# Altium PCB LED and Relay.PcbDoc
Units mm, origin at the board's own origin, x right, y up, seen from the top; angles counter-clockwise.
Board outline 56.13 x 53.21 mm, 2 copper layers (Top Layer, Bottom Layer); 37 components, 34 nets, 153 pads, 7 vias.
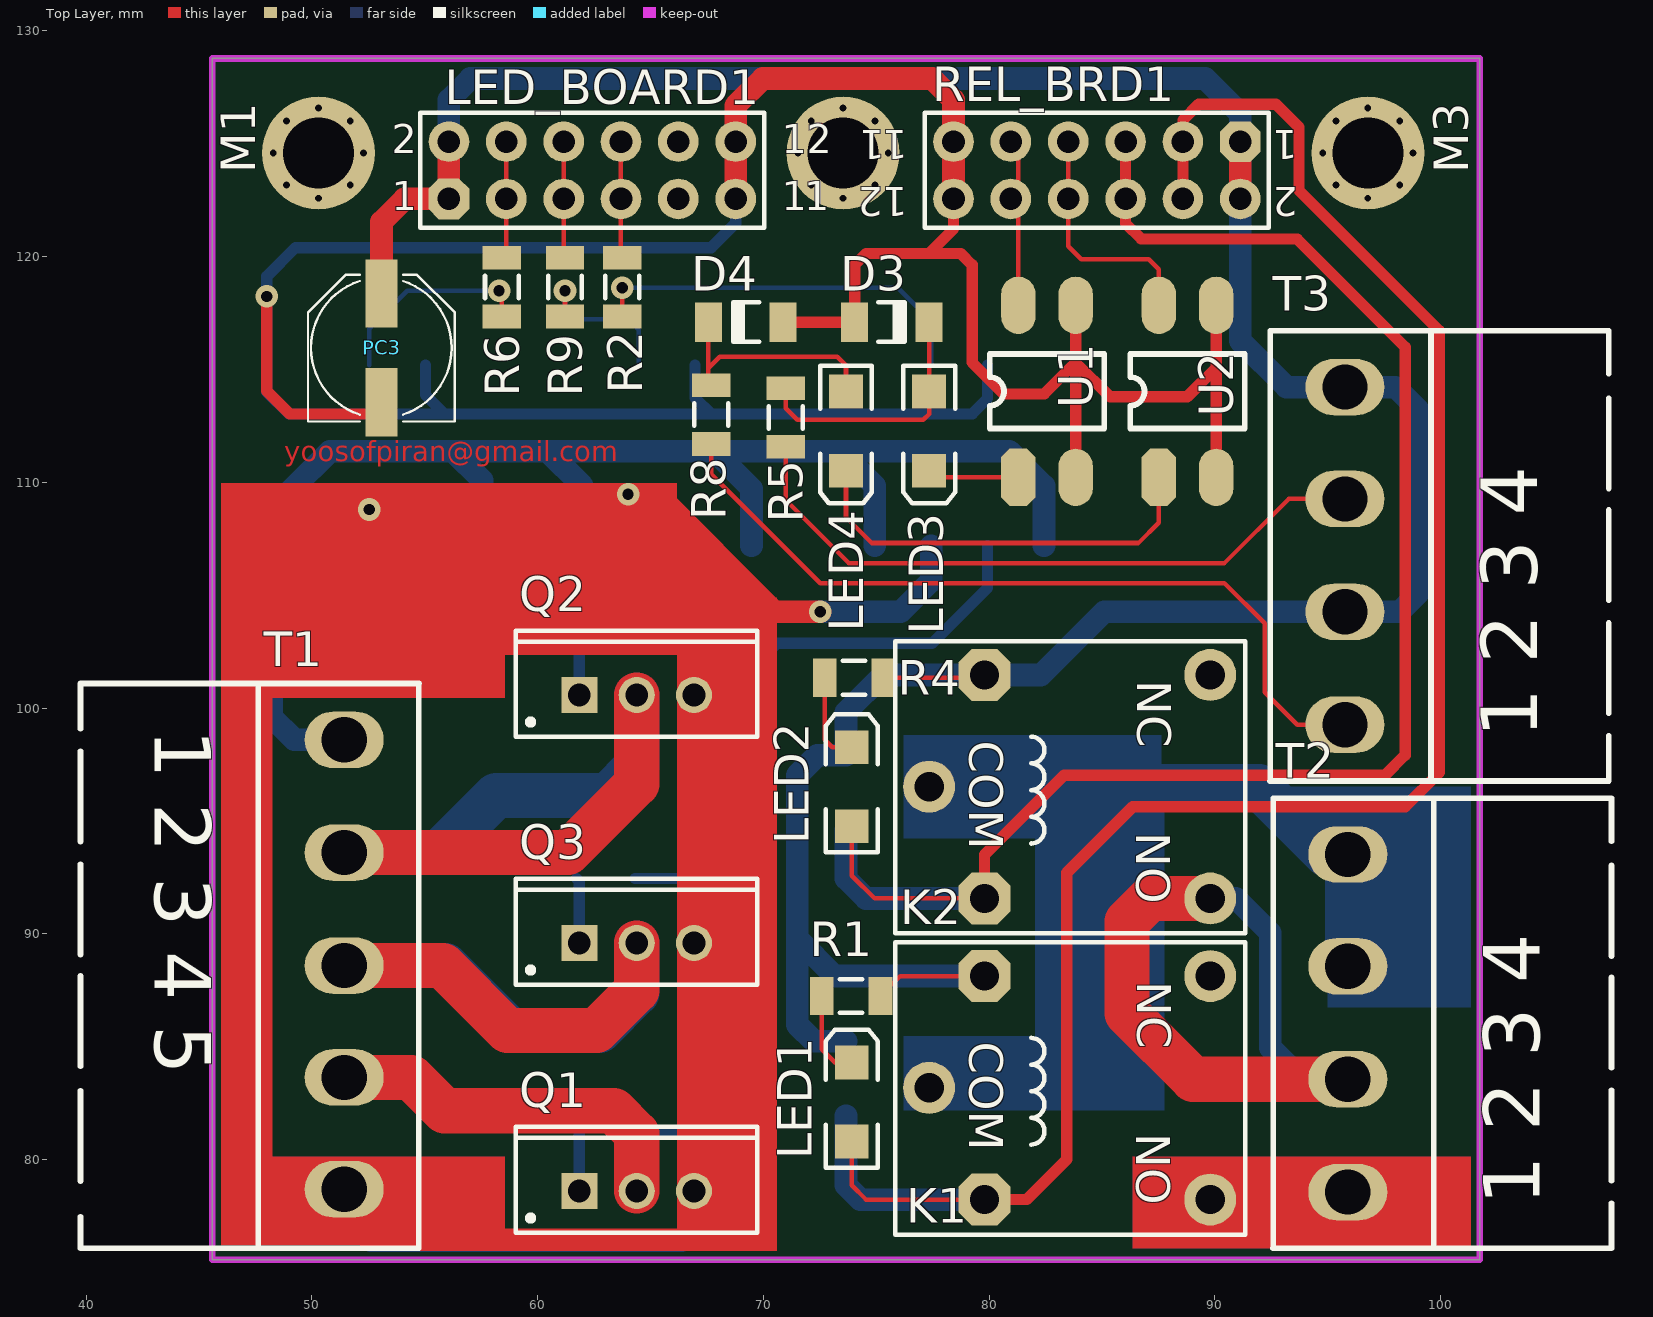
[diagram p0: Top Layer view]
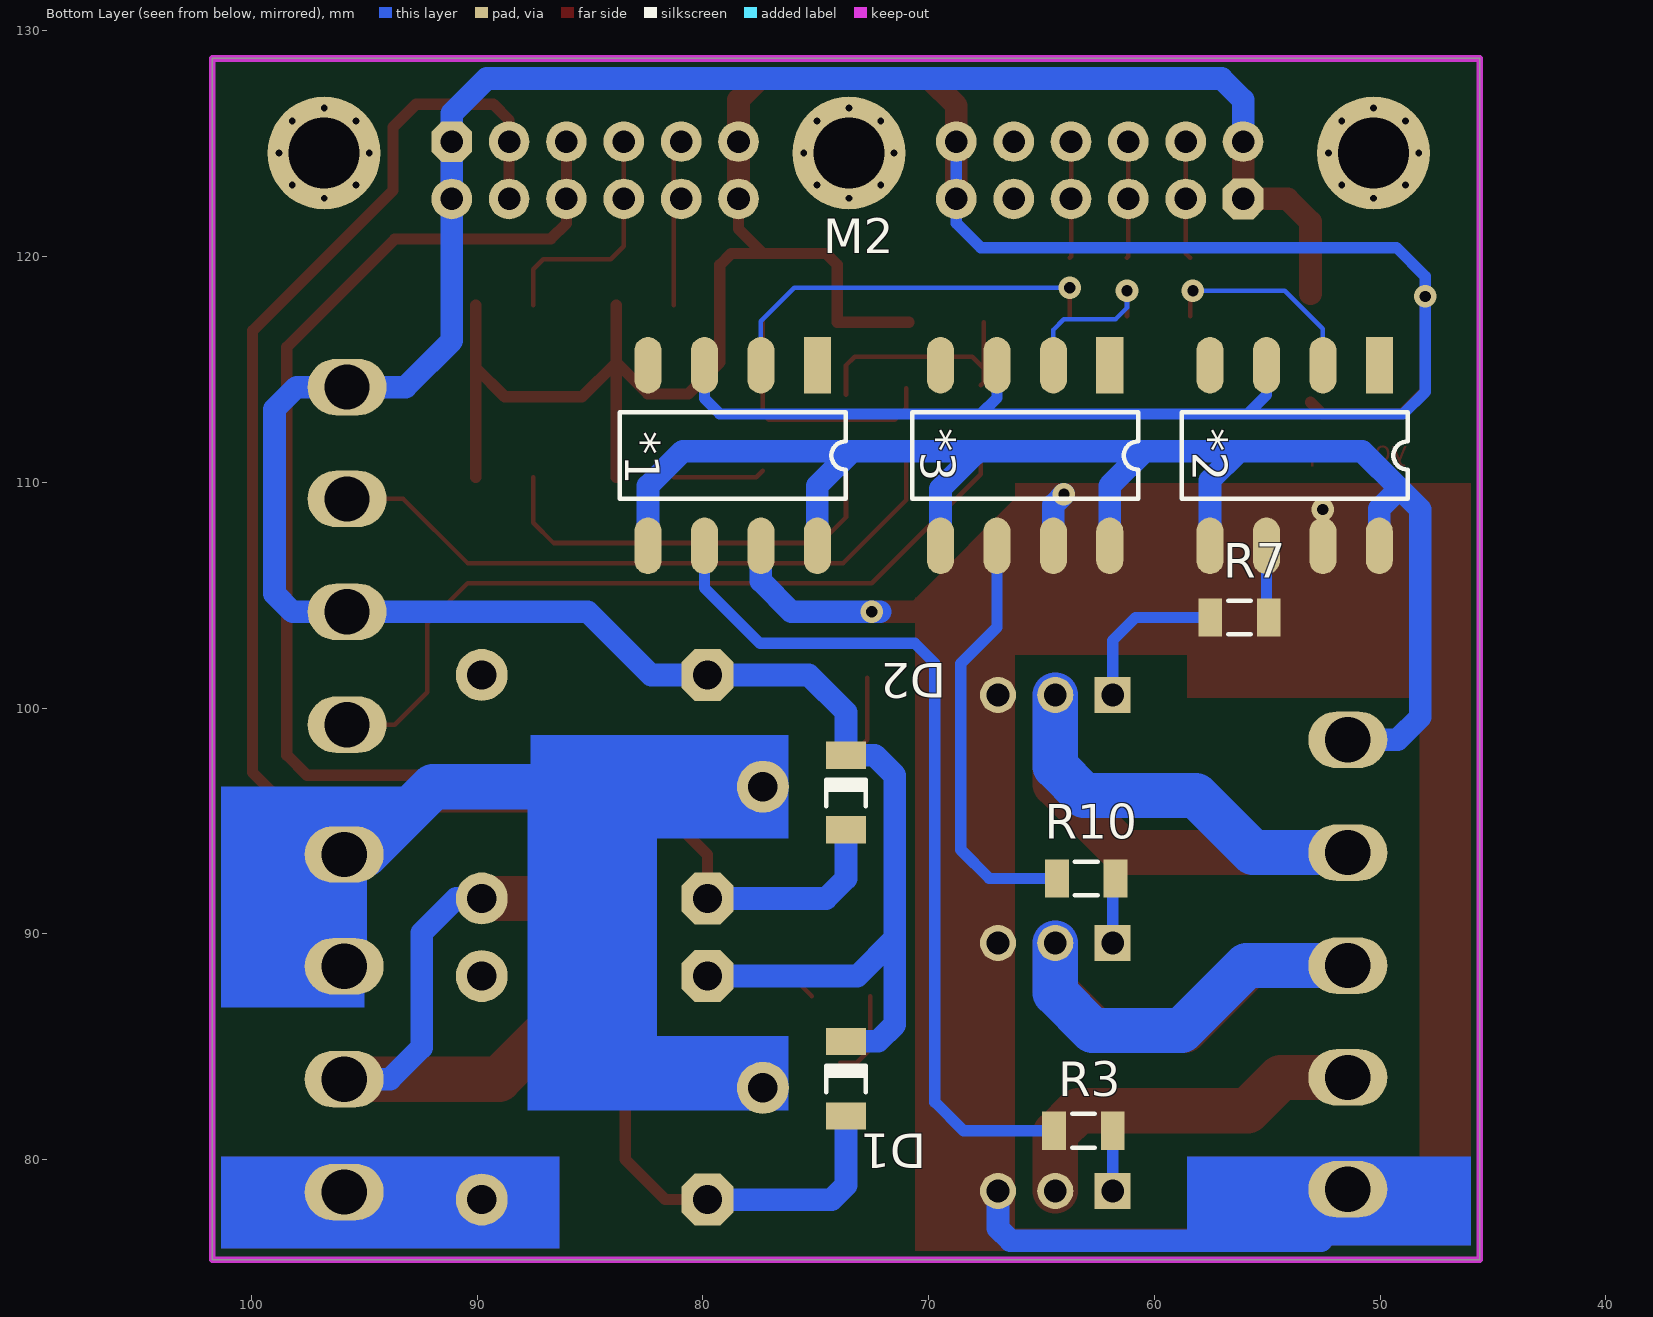
[diagram p1: Bottom Layer view, seen from below]
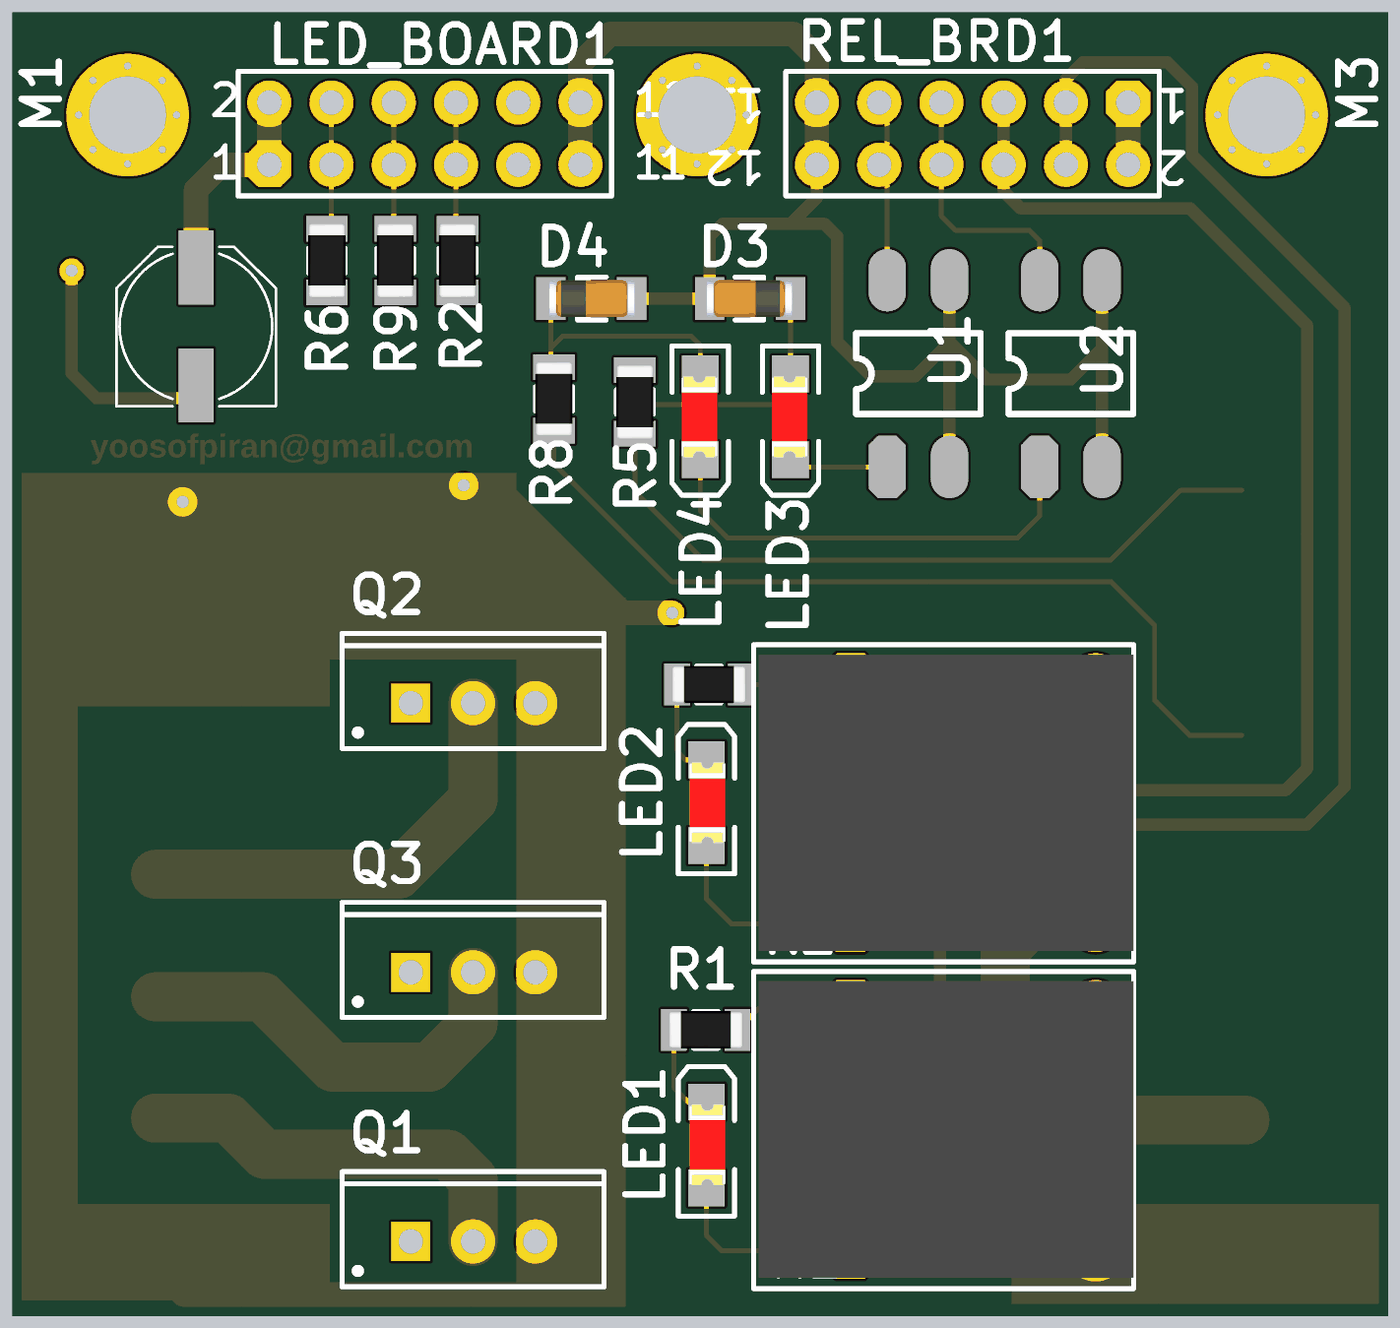
[diagram p2: 3D render of the assembled board from above, using the file's embedded part models]
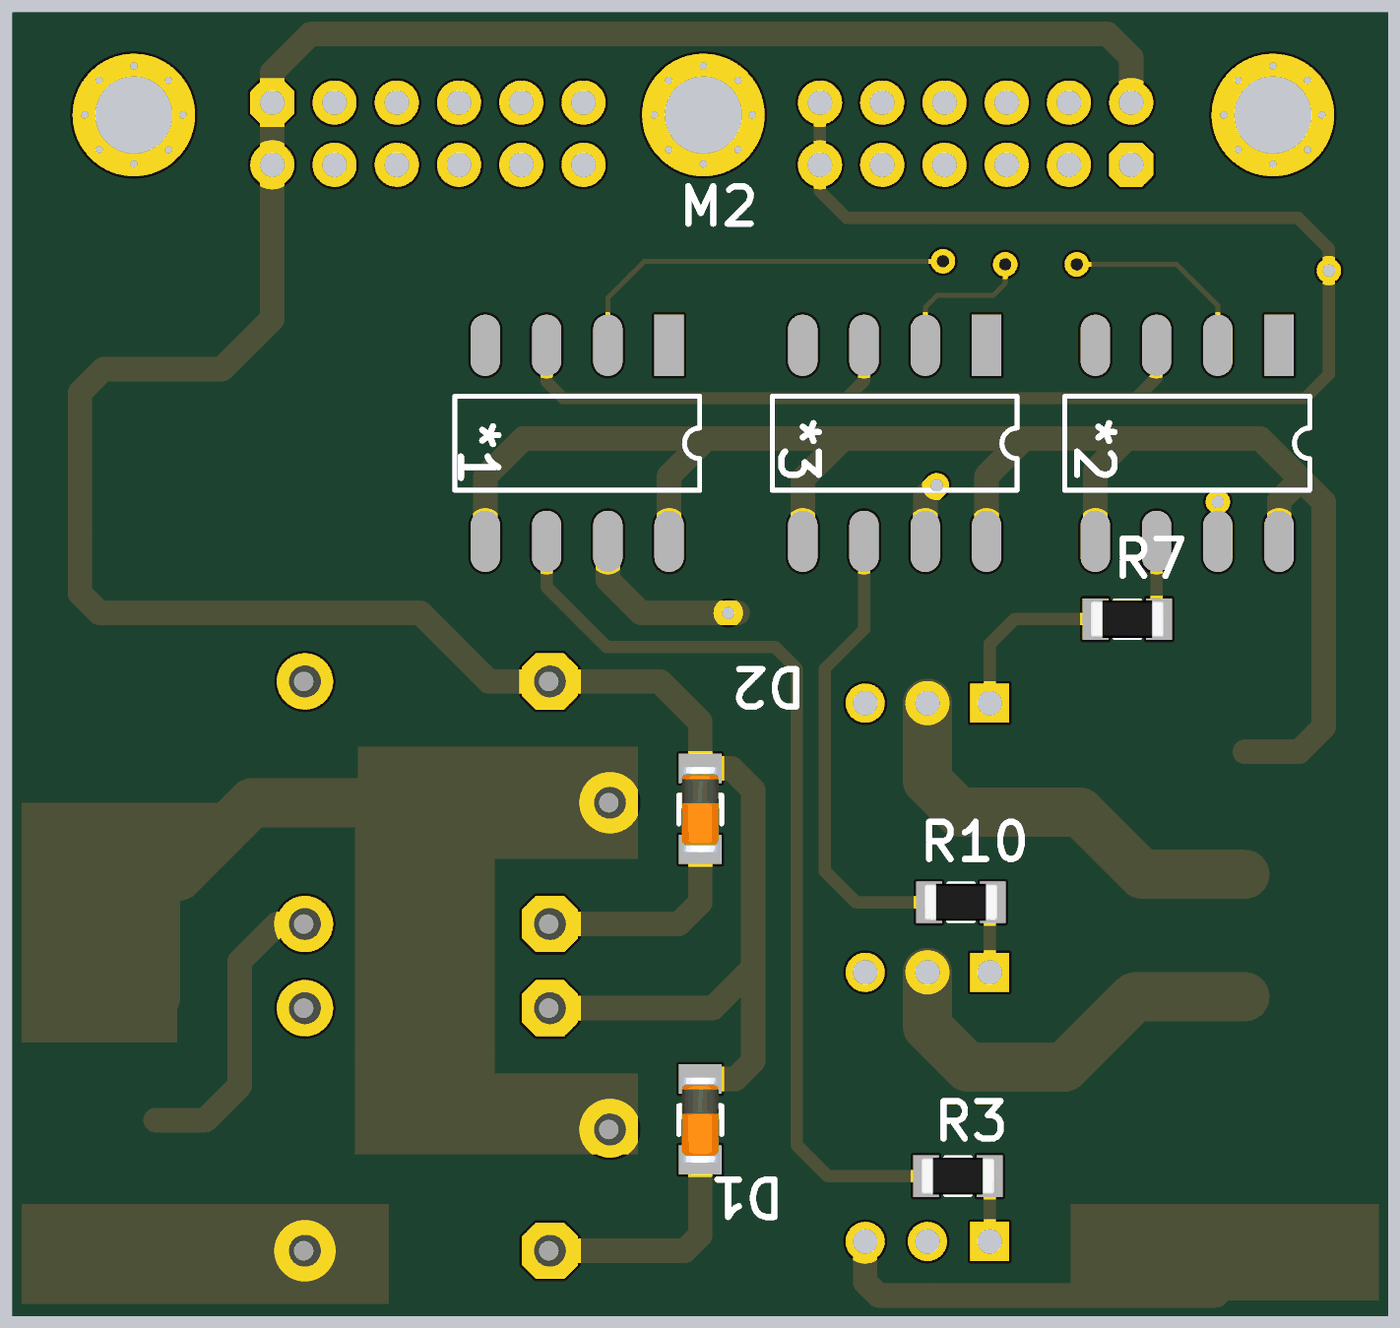
[diagram p3: 3D render of the assembled board from below, using the file's embedded part models]

## Layer stack, top to bottom
Top Solder: solder mask 0.0102, Solder Resist, Dk 3.5
Top Layer: signal copper 0.0356
Dielectric 1: dielectric 0.32, FR-4, Dk 4.8
Bottom Layer: signal copper 0.0356
Bottom Solder: solder mask 0.0102, Solder Resist, Dk 3.5

## Board outline
45.593,75.565 101.727,75.565 101.727,128.778 45.593,128.778

## Design rules (kind name [scope] priority, off if disabled: settings)
Clearance [All] p1: gap=0.2
PolygonConnect [All] p1: connectstyle=Relief reliefconductorwidth=0.254 reliefentries=4 polygonreliefangle="90 Angle" airgapwidth=0.254
RoutingVias [All] p1: holewidth=0.5 width=1 viastyle="Through Hole" minholewidth=0.5 minwidth=1 maxholewidth=4 maxwidth=5
SolderMaskExpansion [All] p1: expansion=0.102
Width [All] p1: maxlimit=5 minlimit=0.2 preferedwidth=0.2
29 further rules are at their usual default settings.

## Classes and differential pairs
component class Sheet1: *1 *2 *3 D1 D2 D3 D4 K1 K2 LED1 LED2 LED3 LED4 LED_BOARD1 M1 M2 M3 Q1 Q2 Q3 R1 R2 R3 R6 R7 R8 R9 R10 REL_BRD1 T1 T3 U1 U2

## Components (designator, comment, footprint, x,y, rotation, side; value= is the part's Value field where it differs from the comment)
*1 "PC923" PC923 82.423,107.188 r180 bottom
*2 "PC923" PC923 57.531,107.188 r180 bottom
*3 "PC923" PC923 69.469,107.188 r180 bottom
D1 "1N4148" LL4148 73.66,83.594 r90 bottom
D2 "1N4148" LL4148 73.66,96.266 r90 bottom
D3 "1N4148" LL4148 75.692,117.094 r0 top
D4 "1N4148" LL4148 69.215,117.094 r180 top
K1 "Relay" "Relay 15.40x12.10x13.10" 77.343,83.185 r270 top
K2 "Relay" "Relay 15.40x12.10x13.10" 77.343,96.52 r270 top
LED1 "Red" "LED SMD 1206" 73.914,82.55 r90 top
LED2 "Red" "LED SMD 1206" 73.914,96.52 r90 top
LED3 "Red" "LED SMD 1206" 77.343,112.268 r270 top
LED4 "Red" "LED SMD 1206" 73.66,112.268 r270 top
LED_BOARD1 "Header 6X2" HDR2X6 56.073,122.555 r0 top
M1 "Screw" "Board Screw_No Silk" 50.292,124.587 r0 top
M2 "Screw" "Board Screw_No Silk" 73.533,124.587 r180 bottom (schematic designator M1)
M3 "Screw" "Board Screw_No Silk" 96.774,124.587 r0 top (schematic designator M2)
PC3 "47u" PANASONIC_D 53.086,115.951 r90 top (schematic designator PC1)
Q1 "IRF3205" TO-220AB 64.389,78.613 r0 top
Q2 "IRF3205" TO-220AB 64.389,100.584 r0 top
Q3 "IRF3205" TO-220AB 64.389,89.599 r0 top
R1 "1K" "RES 1206 (3216X08L)" 75.184,87.249 r180 top
R2 "220" "RES 1206 (3216X08L)" 63.754,117.348 r90 top
R3 "20" "RES 1206 (3216X08L)" 61.849,81.28 r0 bottom
R4 "1K" "RES 1206 (3216X08L)" 75.311,101.346 r180 top
R5 "1K" "RES 1206 (3216X08L)" 70.993,114.173 r270 top
R6 "220" "RES 1206 (3216X08L)" 58.42,117.348 r90 top
R7 "20" "RES 1206 (3216X08L)" 57.531,104.013 r180 bottom
R8 "1K" "RES 1206 (3216X08L)" 67.691,114.3 r270 top
R9 "220" "RES 1206 (3216X08L)" 61.214,117.348 r90 top
R10 "20" "RES 1206 (3216X08L)" 61.722,92.456 r0 bottom
REL_BRD1 "Header 6X2" HDR2X6 91.123,125.095 r180 top
T1 "Phoenix terminal" "phoenix terminal 5" 39.751,101.092 r270 top
T2 "Phoenix terminal" "phoenix terminal 4" 107.569,76.073 r90 top
T3 "Phoenix terminal" "phoenix terminal 4" 107.442,96.774 r90 top
U1 "Optoisolator" My_opto 81.28,110.236 r90 top
U2 "Optoisolator" My_opto 87.503,110.236 r90 top

## Footprints (in the part's own frame and the unit in brackets; to place one, negate y for a bottom-side part, rotate by r counter-clockwise, add the part's x,y. Pads: shape width x height; smd on the part's side, far side on the other; paste and mask are expansions set on the pad)
"Board Screw_No Silk" [mm]
  round 0.6 hole 0.3: S(-2,0) S(-1.414,-1.414) S(-1.414,1.414) S(0,-2) S(0,2) S(1.414,-1.414) S(1.414,1.414) S(2,0)
  round 5 hole 3.15 mask+0.1: S(0,0)
HDR2X6 [mm]
  oct 1.8x1.8 hole 1: 1(0,0)
  round 1.8 hole 1: 2(0,2.54) 3(2.54,0) 4(2.54,2.54) 5(5.08,0) 6(5.08,2.54) 7(7.62,0) 8(7.62,2.54) 9(10.16,0) 10(10.16,2.54) 11(12.7,0) 12(12.7,2.54)
  silkscreen extent -1.27,-1.27 13.97,3.81
"LED SMD 1206" [mm]
  rect 1.5x1.5 smd: 1(-1.75,0) 2(1.75,0)
  silkscreen extent -2.9,-1.15 3.2,1.15, body extent -1.65,-0.76 1.65,0.69, height 1.36
LL4148 [mm] "MELF Diode, 2-Leads, Body 3.5x1.4mm, IPC Medium Density"
  rect 1.2x1.75 smd: 1(-1.65,0) 2(1.65,0)
  silkscreen extent -0.61,-0.87 0.57,0.88, body extent -1.78,-0.75 1.72,0.75, height 1.55
My_opto [mil]
  oct 100x60 smd: 1(-0.5,-0.5)
  oval 100x60 smd: 2(-0.5,-100.5) 3(299.5,-0.5) 4(299.5,-100.5)
  silkscreen extent 84,-150 214,50
PANASONIC_D [mil] "PANASONIC_D"
  rect 119x56 smd: +(95,0) -(-94.49,0)
  silkscreen extent -128,-128 128,128
PC923 [mm]
  rect 1.2x2.5 smd: 1(7.493,8.001)
  oval 1.2x2.5 smd: 2(4.993,8.001) 3(2.493,8.001) 4(-0.007,8.001) 5(-0.007,0.001) 6(2.493,0.001) 7(4.993,0.001) 8(7.493,0.001)
  silkscreen extent -1.26,2.09 8.74,5.92
"phoenix terminal 4" [mm] "4 terminals"
  oval 2.5x3.5 hole 2: 1(2.493,11.684) 2(7.493,11.684) 3(12.493,11.684) 4(17.446,11.684)
  silkscreen extent 0,0 19.94,15
"phoenix terminal 5" [mm] "5 terminals"
  oval 2.5x3.5 hole 2: 1(2.493,11.684) 2(7.493,11.684) 3(12.493,11.684) 4(17.446,11.684) 5(22.399,11.684)
  silkscreen extent 0,0 25.02,15
"Relay 15.40x12.10x13.10" [mm]
  round 2.3 hole 1.3: 1(0,0) 2(-4.95,12.45) 3(4.95,12.45)
  oct 2.3x2.3 hole 1.3: 4(-4.95,2.45) 5(4.95,2.45)
  silkscreen extent -6.45,-1.5 6.5,14, body extent -6.05,-1.3 6.05,14, height 15.6
"RES 1206 (3216X08L)" [mm] "Chip Resistor, 2-Leads, Body 3.2x1.6mm, IPC High Density _ (0.125 W)"
  rect 1.05x1.7 smd: 1(0,0) 2(2.596,0)
  silkscreen extent 0.8,-0.75 1.8,0.75, body extent -0.23,-0.76 2.82,0.76, height 0.6
TO-220AB [mm] "TO, Thru-Hole, Vertical, Heatsink Mounted; 3 In-Line Leads; Pitch 2.54 mm"
  rect 1.6x1.6 hole 1: 1(-2.54,0)
  round 1.6 hole 1: 2(0,0) 3(2.54,0)
  silkscreen extent -5.35,-1.85 5.35,2.85, body extent -5.4,-1.9 5.4,2.9, height 19.3

## Part data
D1 D2 D3 D4: library part "Diode 1N4148", "High Conductance Fast Diode"
K1 K2: "SPDT Relay"
LED1 LED2 LED3 LED4: library part LED, "LED"
LED_BOARD1 REL_BRD1: "Header, 6-Pin, Dual row"
M1 M2 M3: library part "Board Screw", "Board Screw With Spacer"
PC3: library part PANASONIC_D
Q1 Q2 Q3: "HEXFET Power MOSFET"
R1 R2 R3 R4 R5 R6 R7 R8 R9 R10: library part Resistor, "Resistor"
T1: library part "Phoenix terminal 5", "Terminal 5 Pin"
T2 T3: library part "Phoenix terminal 4", "Terminal 4 Pin"

## Via types
v1: diameter 1, hole 0.5, Top Layer to Bottom Layer, 7 vias

## Nets (pads, with @x,y where several pads share a name; then routed paths per layer and width w, separated by ;. In a path a pad name is that pad's centre, name@x,y a point inside that pad or via, vN(x,y) a via of type N, cw(c..) or ccw(c..) an arc to the next point about the centre after c; other vN are vias at no path point)
BPWM: LED_BOARD1.3 LED_BOARD1.4 R6.2 | length 5.2
  Top Layer w0.2: R6.2 58.613,120.137 LED_BOARD1.3 LED_BOARD1.4
CHB: Q2.2 T1.2 | length 35.9
  Top Layer w2: T1.2 61.341,93.599 64.389,96.647 Q2.2
  Bottom Layer w2: T1.2 55.626,93.599 58.166,96.139 63.119,96.139 64.389,97.409 Q2.2
CHG: Q3.2 T1.3 | length 34
  Top Layer w2: T1.3 55.8,88.599 58.674,85.725 62.611,85.725 64.389,87.503 Q3.2
  Bottom Layer w2: T1.3 55.927,88.599 58.801,85.725 62.738,85.725 64.389,87.376 Q3.2
CHR: Q1.2 T1.4 | length 16.5
  Top Layer w2: T1.4 54.403,83.646 55.88,82.169 63.373,82.169 64.389,81.153 Q1.2
COM: K1.1 K2.1 T2.3 T2.4 | length 44.6
  Bottom Layer w2: K1.1 82.169,83.185 84.582,85.598 84.582,94.742 82.804,96.52 ; K2.1 82.804,96.52 ; T2.3 T2.4 94.949,93.519 91.948,96.52 82.804,96.52
GND: *1.3 *2.3 *3.3 D3.1 D4.1 LED_BOARD1.11 LED_BOARD1.12 PC3.- REL_BRD1.11 REL_BRD1.12 U1.2 U1.4 U2.2 U2.4 | length 145.6
  Top Layer w0.5: v1@48.26,118.237 v1(48.006,118.237) 48.006,114.046 49.022,113.03 52.565,113.03 PC3.- ; D4.1 D3.1 74.042,119.635 74.549,120.142 77.343,120.142 ; REL_BRD1.12 78.423,121.222 77.343,120.142 ; U1.2 83.833,115.316 ; U1.4 83.833,115.316 ; U2.2 90.056,115.075 ; U2.4 90.056,115.075 ; 77.343,120.142 78.74,120.142 79.248,119.634 79.248,115.316 80.645,113.919 82.436,113.919 83.833,115.316 ; 83.833,115.316 85.357,113.792 88.773,113.792 90.056,115.075
  Top Layer w1: LED_BOARD1.11 LED_BOARD1.12 68.773,126.685 69.977,127.889 77.47,127.889 78.423,126.936 REL_BRD1.11 REL_BRD1.12
  Bottom Layer w0.5: *2.3 55.038,113.872 55.88,113.03 ; *3.3 66.976,113.745 67.691,113.03 ; LED_BOARD1.12 LED_BOARD1.11 68.773,121.478 67.691,120.396 49.276,120.396 48.006,119.126 48.006,114.011 48.987,113.03 55.88,113.03 ; *1.3 79.93,113.712 79.248,113.03 67.691,113.03 ; 55.88,113.03 67.691,113.03
GPWM: LED_BOARD1.5 LED_BOARD1.6 R9.2 | length 5.2
  Top Layer w0.2: LED_BOARD1.6 LED_BOARD1.5 61.153,120.005 R9.2
IN_1: REL_BRD1.7 REL_BRD1.8 U2.3 | length 10.7
  Top Layer w0.2: REL_BRD1.7 REL_BRD1.8 83.503,120.459 84.074,119.888 87.064,119.888 87.516,119.437 U2.3
IN_2: REL_BRD1.9 REL_BRD1.10 U1.3 | length 7.4
  Top Layer w0.2: REL_BRD1.9 81.293,124.765 U1.3
Net*1_2: *1.2 R2.1 | length 17.5
  Top Layer w0.2: R2.1 v1(63.754,118.618)
  Bottom Layer w0.2: v1(63.754,118.618) 75.946,118.618 77.43,117.134 *1.2
Net*1_6: *1.6 R3.2 | length 38.7
  Bottom Layer w0.5: R3.2 68.453,81.28 69.723,82.55 69.723,101.981 70.612,102.87 77.47,102.87 79.93,105.33 *1.6
Net*2_2: *2.2 R6.1 | length 9.3
  Top Layer w0.2: v1(58.293,118.491) 58.42,118.364 R6.1
  Bottom Layer w0.2: *2.2 52.538,116.8 54.229,118.491 v1(58.293,118.491)
Net*2_6: *2.6 R7.2 | length 3.6
  Bottom Layer w0.5: R7.2@55.038,103.611 *2.6
Net*3_2: *3.2 R9.1 | length 7.1
  Top Layer w0.2: R9.1 v1(61.214,118.491)
  Bottom Layer w0.2: v1(61.214,118.491) 61.214,117.729 61.722,117.221 64.008,117.221 64.476,116.753 *3.2
Net*3_6: *3.6 R10.2 | length 18.9
  Bottom Layer w0.5: R10.2 67.31,92.456 68.58,93.726 68.58,101.981 66.976,103.585 *3.6
NetD3_2: D3.2 LED3.1 R5.1 | length 11.6
  Top Layer w0.2: R5.1 70.993,113.284 71.502,112.775 77.088,112.775 77.342,113.029 D3.2
NetD4_2: D4.2 LED4.1 R8.1 | length 10.6
  Top Layer w0.2: D4.2 67.565,115.062 ; R8.1 67.565,114.426 67.565,115.062 ; LED4.1@73.66,113.891 73.66,115.189 73.279,115.57 68.073,115.57 67.565,115.062
NetK1_3: K1.3 T2.1 | length 12.5
  Top Layer w2: K1.3 90.124,78.566 T2.1
  Bottom Layer w2: K1.3 90.124,78.566 T2.1
NetK2_3: K2.3 T2.2 | length 31.5
  Top Layer w2: K2.3 87.125,91.57 86.106,90.551 86.106,86.487 89.027,83.566 T2.2
  Bottom Layer w1: K2.3 90.929,91.57 92.456,90.043 92.456,84.963 93.853,83.566 T2.2
NetLED1_2: LED1.2 R1.2 | length 3.9
  Top Layer w0.2: R1.2 72.588,84.892 73.18,84.3 LED1.2
NetLED2_2: LED2.2 R4.2 | length 4.1
  Top Layer w0.2: R4.2 72.715,98.608 73.053,98.27 LED2.2
NetLED3_2: LED3.2 U1.1 | length 4.1
  Top Layer w0.2: LED3.2 77.638,110.223 U1.1
NetLED4_2: LED4.2 U2.1 | length 18.6
  Top Layer w0.2: LED4.2@73.66,110.391 73.66,108.458 74.803,107.315 86.614,107.315 87.516,108.217 U2.1
NetQ1_1: Q1.1 R3.1 | length 2.7
  Bottom Layer w0.5: Q1.1 R3.1
NetQ2_1: Q2.1 R7.1 | length 7.2
  Bottom Layer w0.5: R7.1 60.833,104.013 61.849,102.997 Q2.1
NetQ3_1: Q3.1 R10.1 | length 2.9
  Bottom Layer w0.5: R10.1 61.849,92.329 Q3.1
NetR5_2: R5.2 T3.3 | length 29.5
  Top Layer w0.2: R5.2 70.993,109.22 73.787,106.426 90.424,106.426 93.265,109.267 T3.3
NetR8_2: R8.2 T3.1 | length 35.8
  Top Layer w0.2: R8.2 67.691,110.363 72.517,105.537 90.424,105.537 92.202,103.759 92.202,100.711 93.646,99.267 T3.1
POWER: *1.5 *1.8 *2.5 *2.8 *3.5 *3.8 T1.1 | length 73.4
  Bottom Layer w1: *2.8 50.038,108.839 49.149,109.728 ; T1.1 49.229,98.599 48.221,99.607 48.221,101.813 48.221,108.8 49.149,109.728 ; *2.5 57.538,110.102 56.261,111.379 ; *3.8 61.976,109.855 60.452,111.379 ; 67.945,111.252 69.476,109.721 *3.5 ; *1.8 74.93,109.855 73.406,111.379 ; *1.5 82.43,109.848 80.899,111.379 73.406,111.379 ; 49.149,109.728 50.8,111.379 56.261,111.379 ; 56.261,111.379 60.452,111.379 ; 60.452,111.379 73.406,111.379
POWER-G: *1.7 *2.7 *3.7 Q1.3 Q2.3 Q3.3 T1.5 | length 98.9
  Top Layer w1: T1.5 51.435,77.597 52.578,76.454 67.818,76.454 ; v1(52.538,108.799) 53.213,109.474 v1(64.008,109.474) 65.278,109.474 70.485,104.267 ; 66.929,77.343 Q1.3 Q3.3 Q2.3 66.929,102.87 68.326,104.267 70.485,104.267 ; v1(72.517,104.267) 70.485,104.267
  Bottom Layer w1: T1.5 51.435,77.597 52.617,76.415 66.382,76.415 66.929,76.962 Q1.3 ; v1(64.008,109.474) 64.476,109.006 *3.7 ; v1@72.136,104.267 v1(72.517,104.267) 76.073,104.267 77.43,105.624 *1.7
RELAY1: D1.1 K1.5 LED1.1 REL_BRD1.3 REL_BRD1.4 | length 93.5
  Top Layer w0.2: LED1.1 73.914,78.867 74.546,78.235 K1.5
  Top Layer w0.5: K1.5 81.664,78.235 83.439,80.01 83.439,92.71 86.36,95.631 98.425,95.631 99.949,97.155 99.949,116.713 93.726,122.936 93.726,125.73 92.71,126.746 89.281,126.746 88.583,126.048 REL_BRD1.3 REL_BRD1.4
  Bottom Layer w1: D1.1 73.66,78.867 74.292,78.235 K1.5
RELAY2: D2.1 K2.5 LED2.1 REL_BRD1.5 REL_BRD1.6 | length 75.9
  Top Layer w0.2: LED2.1 73.914,92.583 74.927,91.57 K2.5
  Top Layer w0.5: K2.5 79.793,93.509 83.312,97.028 97.536,97.028 98.425,97.917 98.425,115.993 93.641,120.777 86.741,120.777 86.043,121.475 REL_BRD1.6 REL_BRD1.5
  Bottom Layer w1: D2.1 73.66,92.456 74.546,91.57 K2.5
RPWM: LED_BOARD1.7 LED_BOARD1.8 R2.2 | length 5.2
  Top Layer w0.2: LED_BOARD1.8 LED_BOARD1.7 63.693,120.005 R2.2
VCC: D1.2 D2.2 K1.4 K2.4 LED_BOARD1.1 LED_BOARD1.2 PC3.+ R1.1 R4.1 REL_BRD1.1 REL_BRD1.2 T3.2 T3.4 | length 140.9
  Top Layer w0.2: R1.1 76.07,88.135 K1.4 ; R4.1 79.669,101.346 K2.4
  Top Layer w1: PC3.+ 53.086,121.539 54.102,122.555 LED_BOARD1.1 LED_BOARD1.2 ; REL_BRD1.2 REL_BRD1.1
  Bottom Layer w1: LED_BOARD1.2 56.073,126.939 57.023,127.889 89.574,127.889 91.123,126.34 REL_BRD1.1 REL_BRD1.2 91.123,116.268 93.171,114.22 T3.4 97.997,114.22 98.972,113.245 98.972,105.068 98.171,104.267 T3.2 85.09,104.267 82.293,101.47 K2.4 75.308,101.47 73.66,99.822 D2.2 72.389,97.916 71.501,97.028 71.501,89.789 ; D1.2 72.236,85.244 71.501,85.979 71.501,89.789 ; K1.4 73.155,88.135 71.501,89.789
pads on no net: *1.1 *1.4 *2.1 *2.4 *3.1 *3.4 K1.2 K2.2 LED_BOARD1.9 LED_BOARD1.10 M1.S M2.S M3.S

## Keep-outs
Keep-Out Layer:
  the board outline again, w0.3

## Other copper
Top Layer:
  rectangle net POWER-G: 66.167,75.946 70.612,104.902
  rectangle net POWER-G: 51.308,102.362 66.167,109.982
  rectangle net POWER-G: 66.167,104.902 66.675,107.95
  rectangle net POWER-G: 66.675,104.902 67.437,107.696
  rectangle net POWER-G: 67.437,104.902 68.072,107.061
  rectangle net POWER-G: 68.072,104.902 68.58,106.299
  rectangle net POWER-G: 68.58,104.902 69.215,105.791
  rectangle net NetK1_3: 86.36,76.073 101.346,80.137
  rectangle net POWER-G: 45.974,102.362 51.308,109.982
  rectangle net POWER-G: 45.974,76.2 48.26,102.362
  rectangle net POWER-G: 47.498,76.2 58.547,80.137
  rectangle net POWER-G: 46.99,100.457 58.547,103.886
  text "yoosofpiran@gmail.com" at 48.768,110.617 h1.52
Bottom Layer:
  rectangle net COM: 82.042,82.169 87.757,97.155
  rectangle net NetK1_3: 86.36,76.073 101.346,80.137
  rectangle net COM: 94.996,86.741 101.346,96.266
  rectangle net COM: 92.71,94.742 101.346,96.52
  rectangle net COM: 76.2,94.234 87.63,98.806
  rectangle net COM: 76.2,82.169 83.312,85.471
  rectangle net POWER-G: 45.974,76.2 58.547,80.137

## Silkscreen, mask and mechanical layers (free items; w line width, h text height)
Drill Drawing:
  text "Drill Drawing." at 74.041,71.628 h1.52
  text ".LEGEND" at 73.152,68.58 h1.52

## Dimensions
45.593,75.565 to 45.593,128.778 on Mechanical 1
45.593,75.565 to 101.727,75.565 on Mechanical 1

## Text inside footprints (layer, text, board x,y; h text height)
K1: Top Overlay "NC" at 86.563,87.909 h1.5 r270; Top Overlay "NO" at 86.512,81.178 h1.5 r270; Top Overlay "COM" at 79.121,85.217 h1.5 r270
K2: Top Overlay "NC" at 86.563,101.244 h1.5 r270; Top Overlay "NO" at 86.512,94.513 h1.5 r270; Top Overlay "COM" at 79.121,98.552 h1.5 r270
LED_BOARD1: Top Overlay "2" at 53.533,124.587 h1.27; Top Overlay "1" at 53.533,122.047 h1.27; Top Overlay "1" at 70.805,122.047 h1.27; Top Overlay "1" at 71.821,122.047 h1.27; Top Overlay "12" at 70.805,124.587 h1.27
REL_BRD1: Top Overlay "12" at 76.391,123.063 h1.27 r180; Top Overlay "1" at 75.375,125.603 h1.27 r180; Top Overlay "1" at 76.391,125.603 h1.27 r180; Top Overlay "1" at 93.663,125.603 h1.27 r180; Top Overlay "2" at 93.663,123.063 h1.27 r180
T1: Top Overlay "1 2 3 4 5" at 43.053,99.06 h2.5 r270
T2: Top Overlay "1 2 3 4" at 104.394,77.978 h2.5 r90
T3: Top Overlay "1 2 3 4" at 104.267,98.679 h2.5 r90